# Altium PCB PCB_hand washing machine_2021-05-20.pcbdoc
Units mm, origin at the board's own origin, x right, y up, seen from the top; angles counter-clockwise.
Board outline 80.64 x 60.63 mm, 2 copper layers (Top Layer, Bottom Layer); 14 components, 14 nets, 45 pads, 0 vias.
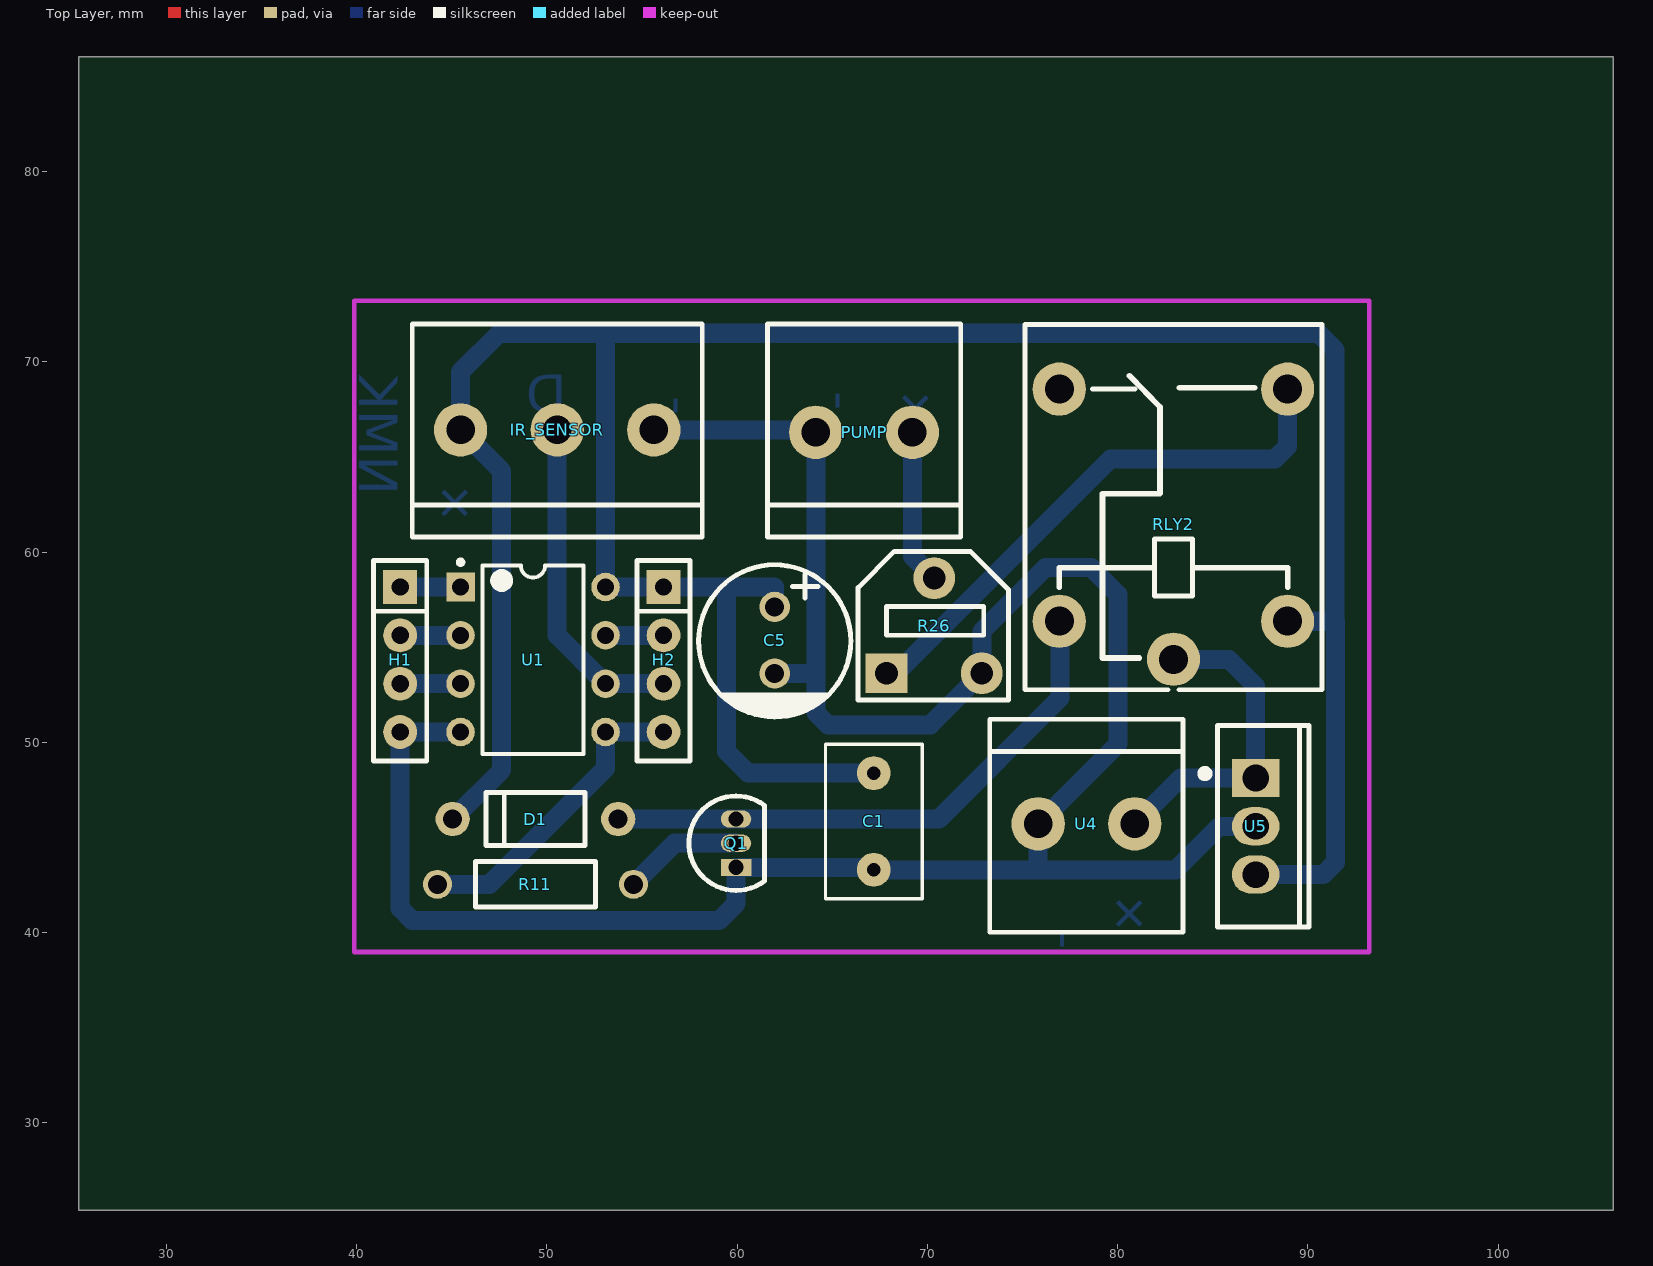
[diagram p0: Top Layer view]
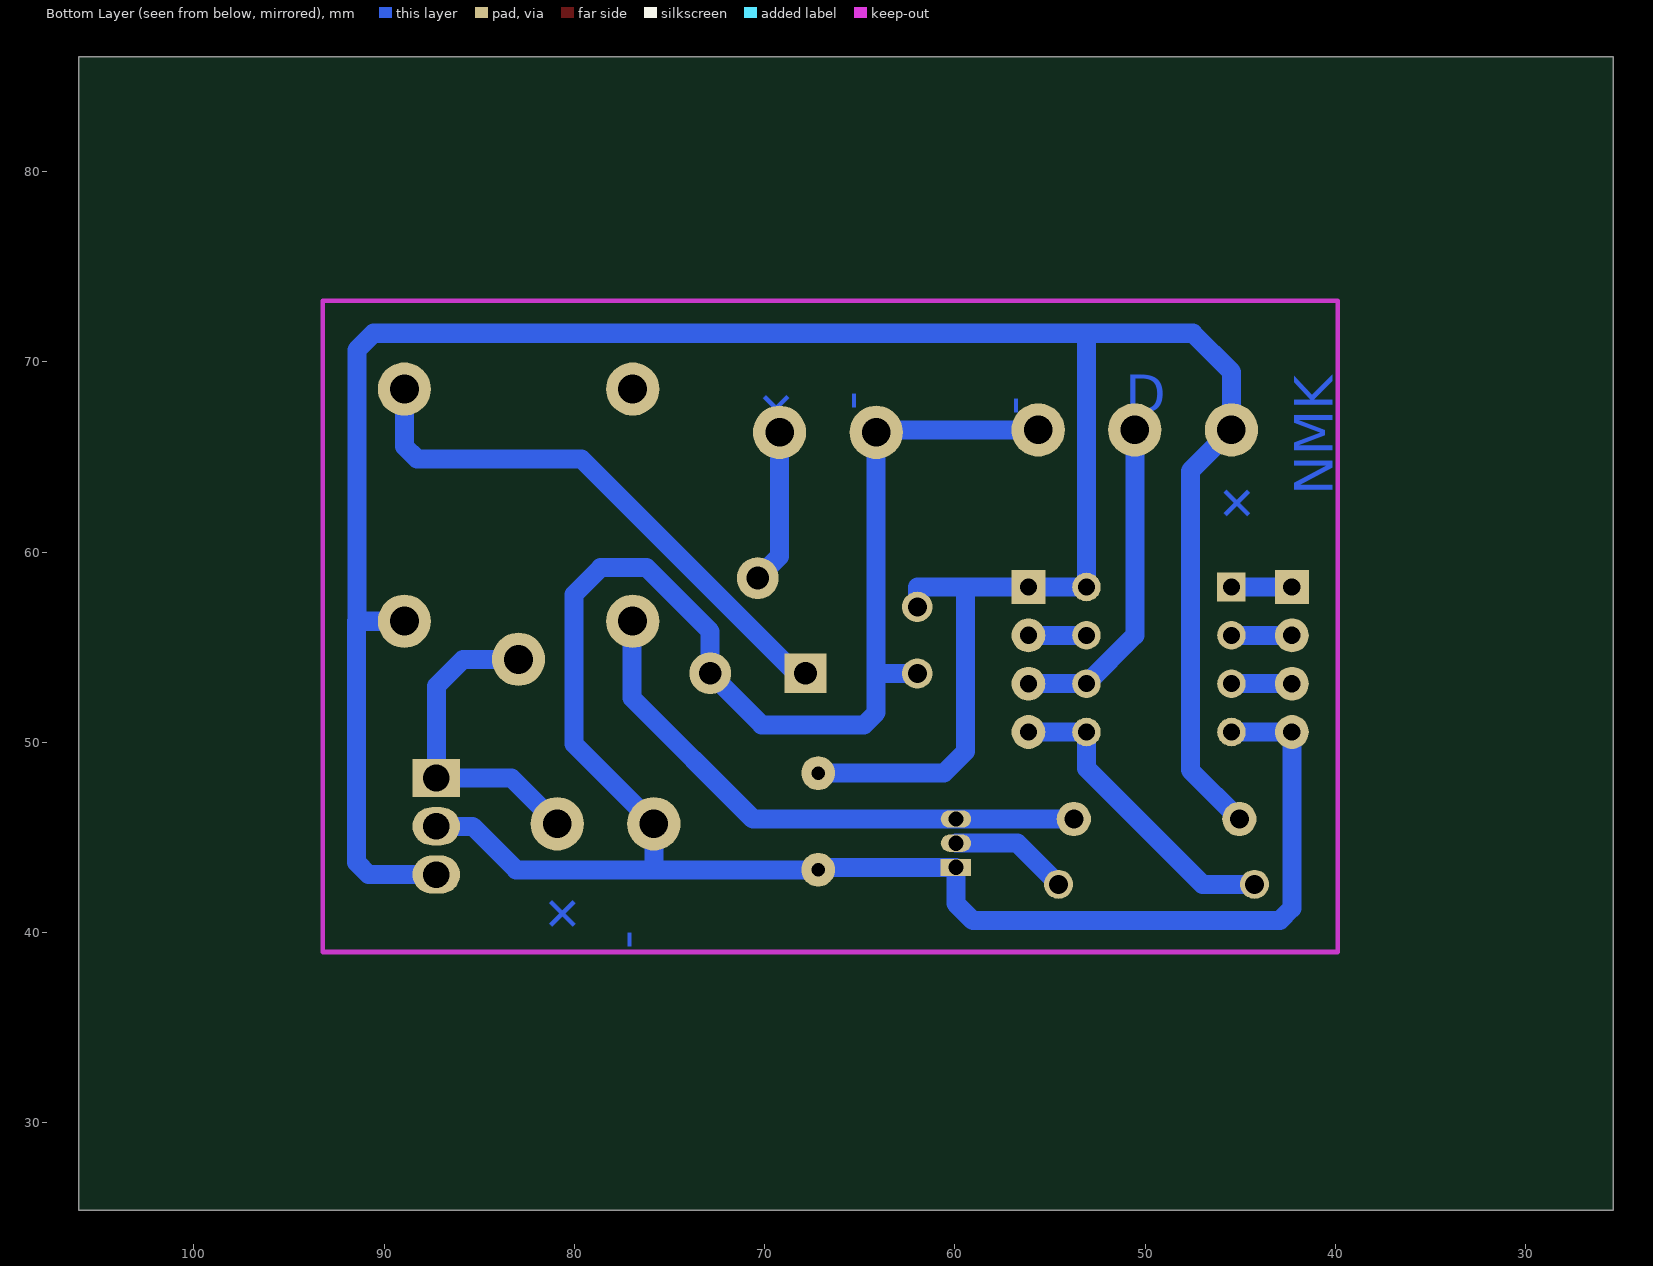
[diagram p1: Bottom Layer view, seen from below]

## Layer stack, top to bottom
Top Layer: signal copper (thickness not stored)
Dielectric: dielectric 0.32, FR-4, Dk 4.8
Bottom Layer: signal copper (thickness not stored)

## Board outline
106.045,25.4 25.4,25.4 25.4,86.031 106.045,86.031

## Components (designator, comment, footprint, x,y, rotation, side; value= is the part's Value field where it differs from the comment)
C1 "100nF" RAD-0.2 67.183,45.843 r90 top
C5 "220uF" CAP-TH_BD8.0-P3.50-D1.0-FD 61.976,55.368 r270 top
D1 "1N4004" DO-41_BD2.4-L4.7-P8.70-D0.9-FD 49.403,45.97 r180 top
H1 "HEADER 4P 2.54MM" "HEADER 4P 2.54MM" 42.291,53.082 r0 top
H2 "HEADER 4P 2.54MM" "HEADER 4P 2.54MM" 56.134,53.082 r0 top
IR_SENSOR "Terminal 5.08 3P" PRINTKLEMME_5.08_3P 55.626,66.417 r180 top
PUMP "Terminal 5.08 2P" PRINTKLEMME_5.08_2P 69.215,66.29 r180 top
Q1 "2N5551_C147849" TO-92-3_L4.9-W3.7-P1.27-L 59.944,44.7 r90 top
R11 "220" RES-TH_BD2.4-L6.3-P10.30-D0.6 49.403,42.541 r0 top
R26 "1K" RES-ADJ-SMD_RM065-V1 70.358,56.13 r0 top
RLY2 "SRD-05VDC-SL-C" RELAY-TH_SRD-XXVDC-XL-C 82.931,61.464 r90 top
U1 "ATTINY13A-PU" DIP-8_L9.8-W6.6-P2.54-LS7.6-BL 49.276,54.352 r270 top
U4 "Terminal 5.08 2P" PRINTKLEMME_5.08_2P 75.819,45.716 r0 top
U5 "7805" TO-220-3_L10.0-W4.5-P2.54-L 87.249,45.589 r270 top

## Footprints (in the part's own frame and the unit in brackets; to place one, negate y for a bottom-side part, rotate by r counter-clockwise, add the part's x,y. Pads: shape width x height; smd on the part's side, far side on the other; paste and mask are expansions set on the pad)
CAP-TH_BD8.0-P3.50-D1.0-FD [mm]
  round 1.6 hole 1: 1(-1.75,0) 2(1.75,0)
  silkscreen extent -3.96,-4 4.04,4
DIP-8_L9.8-W6.6-P2.54-LS7.6-BL [mm]
  rect 1.5x1.5 hole 0.9: 1(-3.81,-3.81)
  round 1.5 hole 0.9: 2(-1.27,-3.81) 3(1.27,-3.81) 4(3.81,-3.81) 5(3.81,3.81) 6(1.27,3.81) 7(-1.27,3.81) 8(-3.81,3.81)
  silkscreen extent -5.23,-3.93 4.96,2.65
DO-41_BD2.4-L4.7-P8.70-D0.9-FD [mm]
  round 1.8 hole 1: 1(-4.35,0) 2(4.35,0)
  silkscreen extent -2.6,-1.4 2.6,1.4
"HEADER 4P 2.54MM" [mil]
  rect 70x70 hole 36: 1(0,200)
  round 70 hole 36: 2(0,100) 3(0,0) 4(0,-100)
  silkscreen extent -55,-160 55,255
PRINTKLEMME_5.08_2P [mm]
  round 2.8 hole 1.5: 1(5.08,0) 2(0,0)
  silkscreen extent -2.54,-5.7 7.62,5.5
PRINTKLEMME_5.08_3P [mm]
  round 2.8 hole 1.5: 1(10.16,0) 2(5.08,0) 3(0,0)
  silkscreen extent -2.54,-5.57 12.7,5.63
RAD-0.2 [mil]
  round 70 hole 28: 1(100,0) 2(-100,0)
  silkscreen extent -160,-100 160,100
RELAY-TH_SRD-XXVDC-XL-C [mil]
  round 110 hole 60: 1(-200.79,-236.22) 2(279.53,-236.2) 3(279.53,236.2) 4(-200.79,236.22) 5(-279.53,0)
  silkscreen extent -342,-307 413,307
RES-ADJ-SMD_RM065-V1 [mm]
  rect 2.2x2.1 hole 1.199: 1(-2.499,-2.5)
  round 2.2 hole 1.199: 2(0,2.5) 3(2.499,-2.499)
  silkscreen extent -4,-3.9 3.9,3.9
RES-TH_BD2.4-L6.3-P10.30-D0.6 [mm]
  round 1.524 hole 1: 1(-5.15,0) 2(5.15,0)
  silkscreen extent -3.15,-1.2 3.15,1.2
TO-92-3_L4.9-W3.7-P1.27-L [mm]
  rect 0.9x1.6 hole 0.8: 1(-1.27,0)
  oval 0.9x1.6 hole 0.8: 2(0,0) 3(1.27,0)
  silkscreen extent -2.48,-1.5 2.48,2.48
TO-220-3_L10.0-W4.5-P2.54-L [mm]
  rect 2x2.5 hole 1.4: 1(-2.54,0)
  oval 2x2.5 hole 1.4: 2(0,0) 3(2.54,0)
  silkscreen extent -5.3,-2.86 5.3,2.8

## Nets (pads, with @x,y where several pads share a name; then routed paths per layer and width w, separated by ;. In a path a pad name is that pad's centre, name@x,y a point inside that pad or via, vN(x,y) a via of type N, cw(c..) or ccw(c..) an arc to the next point about the centre after c; other vN are vias at no path point)
12V: RLY2.5 U4.1 U5.1 | length 17.1
  Bottom Layer w1: U4.1 83.312,48.129 U5.1 87.249,52.955 85.84,54.364 RLY2.5
D1_1: D1.1 Q1.3 RLY2.4 | length 29.9
  Bottom Layer w1: D1.1 Q1.3 70.612,45.97 76.962,52.32 76.962,56.333 RLY2.4
GND: C1.2 C5.2 H1.4 IR_SENSOR.3 PUMP.1 Q1.1 R26.3 U1.4 U4.2 U5.2 | length 128.6
  Bottom Layer w1: U1.4 H1.4 42.291,41.271 42.926,40.636 59.055,40.636 59.944,41.525 Q1.1 67.056,43.43 C1.2 75.819,43.303 ; IR_SENSOR.3 64.008,66.417 PUMP.1 64.135,53.618 ; U5.2 85.344,45.589 83.058,43.303 75.819,43.303 ; 64.135,53.618 C5.2 64.135,53.618 ; 64.135,53.618 64.135,51.558 64.77,50.923 70.149,50.923 R26.3 72.857,55.836 76.2,59.178 78.613,59.178 80.01,57.781 80.01,49.907 U4.2 ; 75.819,43.303 U4.2 ; 75.819,43.303 U4.2
PB0: H2.4 R11.1 U1.5 | length 16.3
  Bottom Layer w1: R11.1 46.99,42.541 53.086,48.637 U1.5 H2.4
PB1: H2.3 IR_SENSOR.2 U1.6 | length 17.4
  Bottom Layer w1: IR_SENSOR.2 50.546,55.622 U1.6 H2.3
PB2: H2.2 U1.7 | length 3
  Bottom Layer w1: U1.7 H2.2
PB3: H1.2 U1.2 | length 3.2
  Bottom Layer w1: H1.2 U1.2
PB4: H1.3 U1.3 | length 3.2
  Bottom Layer w1: H1.3 U1.3
PB5: H1.1 U1.1 | length 3.2
  Bottom Layer w1: H1.1 U1.1
Q1_2: Q1.2 R11.2 | length 6.3
  Bottom Layer w1: R11.2 56.712,44.7 Q1.2
R26_1: R26.1 RLY2.2 | length 29
  Bottom Layer w1: R26.1@67.859,53.631 68.367,53.631 79.629,64.893 88.265,64.893 88.93,65.559 RLY2.2
R26_2: PUMP.2 R26.2 | length 8.1
  Bottom Layer w1: PUMP.2 69.215,59.773 R26.2
RLY2_3: RLY2.3
VCC: C1.1 C5.1 D1.2 H2.1 IR_SENSOR.1 RLY2.1 U1.8 U5.3 | length 154.4
  Bottom Layer w1: D1.2 47.625,48.543 47.625,64.258 IR_SENSOR.1 45.466,69.465 47.498,71.497 53.086,71.497 U1.8 H2.1 61.976,58.162 ; 51.384,71.497 90.551,71.497 91.42,70.629 91.42,56.364 RLY2.1 91.44,56.364 91.44,43.684 90.805,43.049 U5.3 ; C1.1 60.579,48.383 59.436,49.526 59.436,58.162 61.976,58.162 ; 61.976,58.162 C5.1 61.976,58.162

## Other copper
Bottom Layer:
  text "-" at 66.04,68.449 h2.03 r90
  text "-" at 57.531,68.195 h2.03 r90
  text "+" at 70.822,67.731 h2.03 r45
  text "D" at 51.054,67.306 h2.03
  text "NMK" at 40.132,62.988 h2.03 r270
  text "+" at 45.383,61.127 h2.03 r315
  text "-" at 77.851,40.128 h2.03 r90
  text "+" at 80.816,39.537 h2.03 r315